# Altium PCB smallestSize.PcbDoc
Units mil, origin at the board's own origin, x right, y up, seen from the top; angles counter-clockwise.
Board outline 2105 x 2325 mil, 2 copper layers (Top Layer, Bottom Layer); 13 components, 2 nets, 40 pads, 0 vias.
Unrouted connection lines stored in the file: 19.
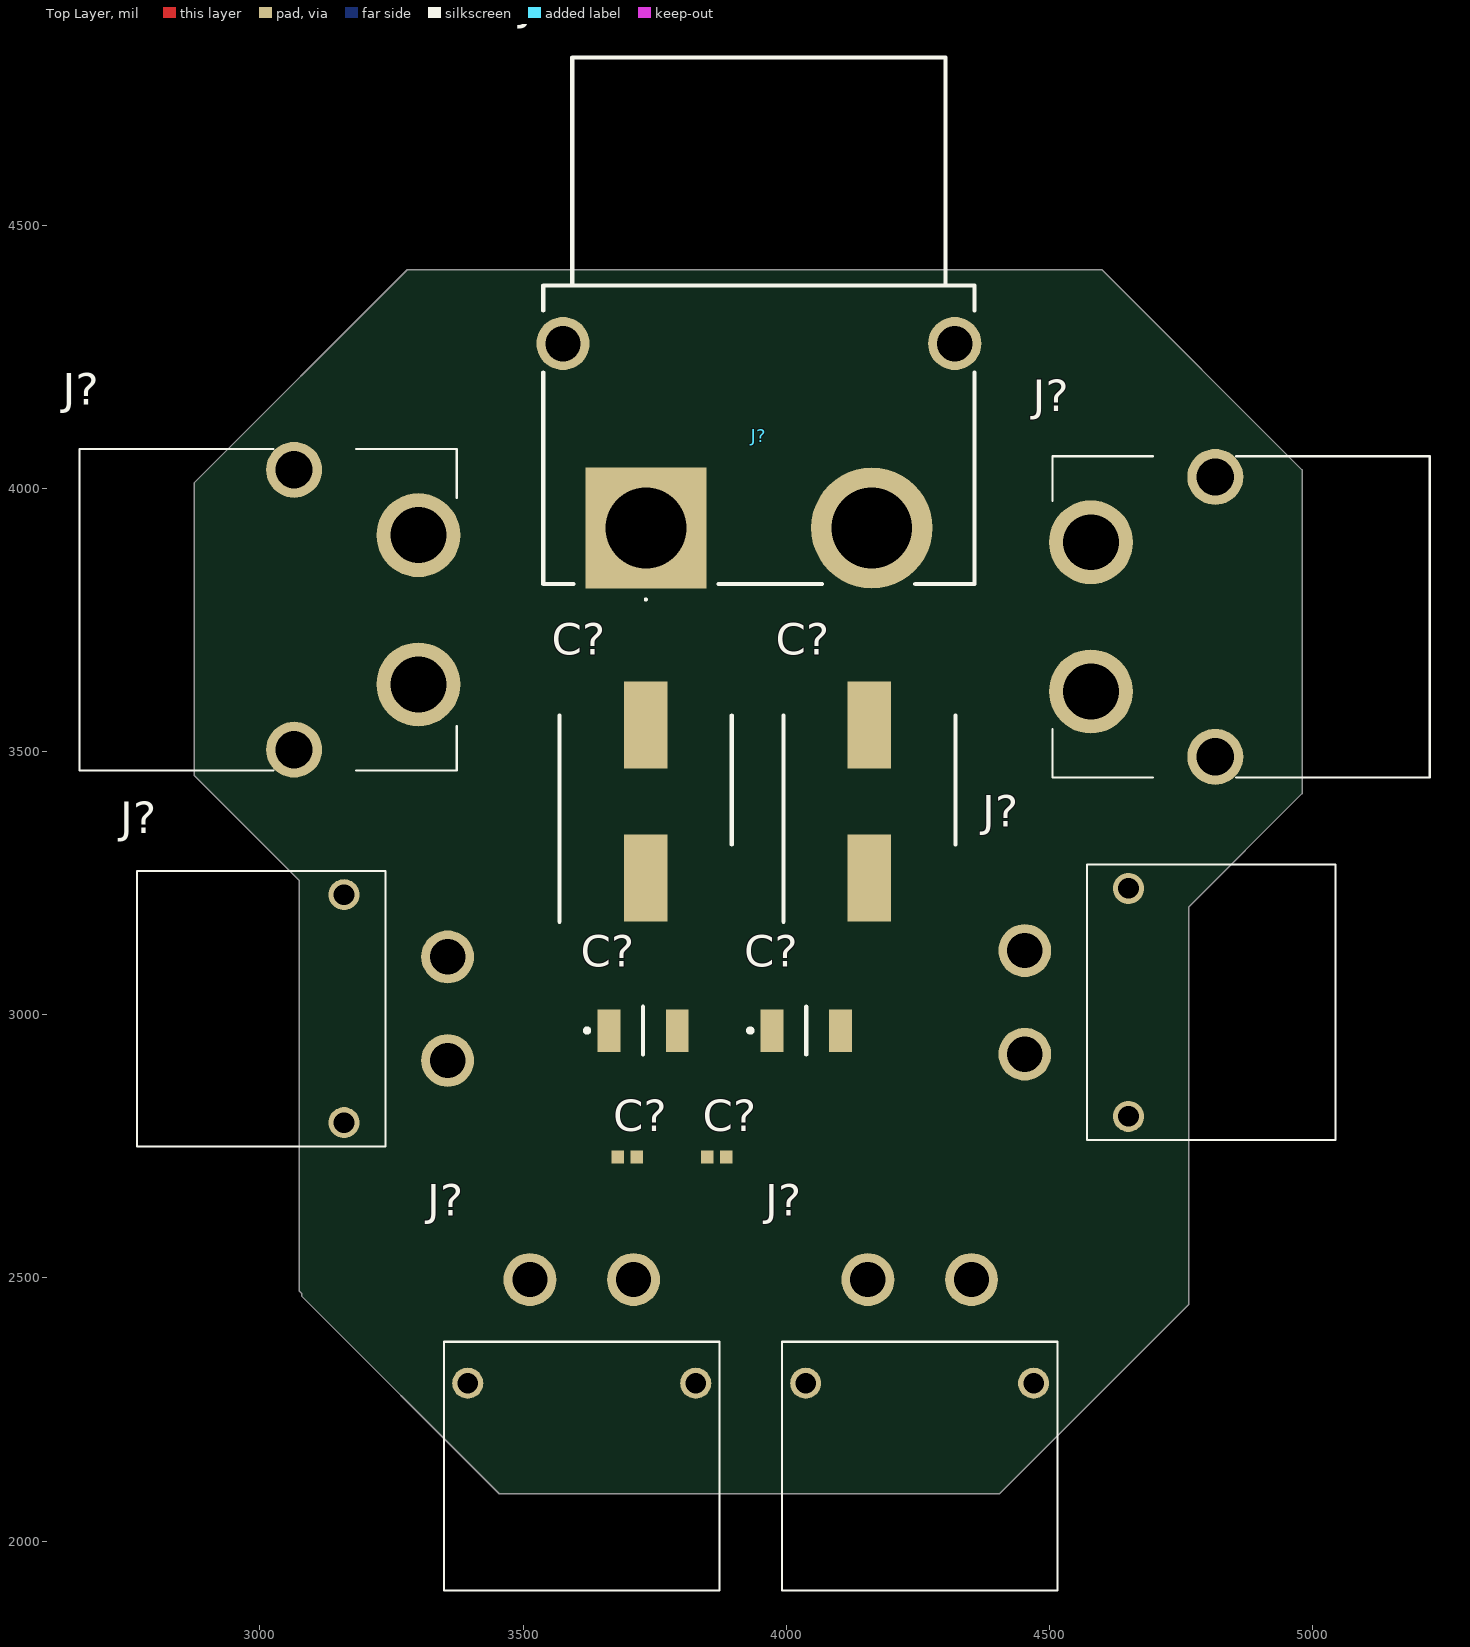
[diagram p0: Top Layer view]
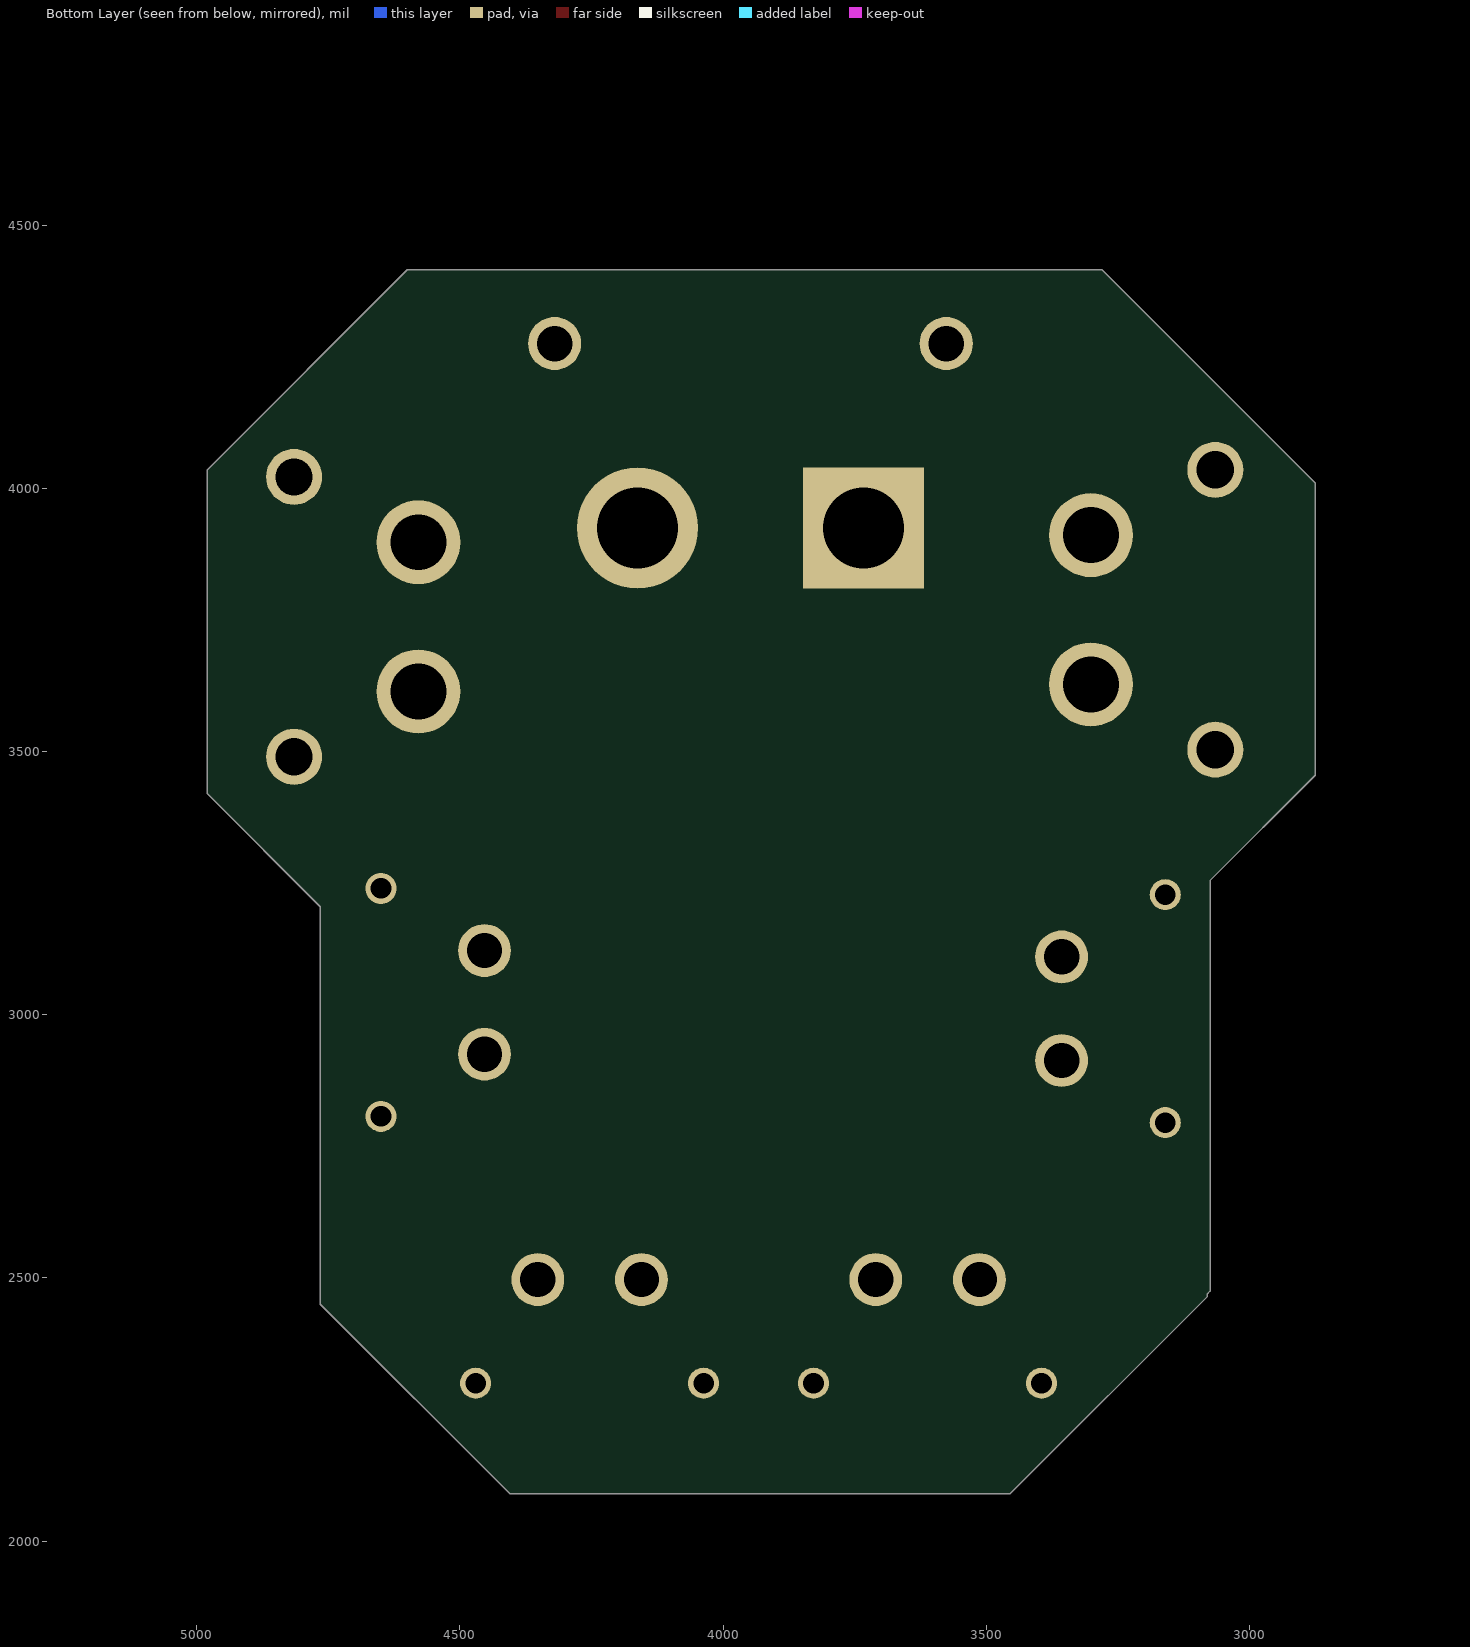
[diagram p1: Bottom Layer view, seen from below]

## Layer stack, top to bottom
Top Solder: solder mask 0.4, Solder Resist, Dk 3.5
Top Layer: signal copper 1.4
Dielectric 1: dielectric 12.6, FR-4, Dk 4.8
Bottom Layer: signal copper 1.4
Bottom Solder: solder mask 0.4, Solder Resist, Dk 3.5

## Board outline
3075,2475 3080,2470 3080,2465 3455,2090 4405,2090 4765,2450 4765,3205 4980,3420 4980,4035 4600,4415 3280,4415 2875,4010 2875,3455 3075,3255

## Design rules (kind name [scope] priority, off if disabled: settings)
Clearance [All] p1: gap=10 ignorepadtopadclearanceinfootprint=FALSE
PolygonConnect [All] p1: connectstyle=Relief reliefconductorwidth=10 reliefentries=4 polygonreliefangle="90 Angle" airgapwidth=10
RoutingVias [All] p1: holewidth=28 width=50 viastyle="Through Hole" minholewidth=28 minwidth=50 maxholewidth=28 maxwidth=50
SolderMaskExpansion [All] p1: expansion=4 istentingtop=FALSE
SupplyNets "Schematic Supply Nets" [InNet('GND')] p1: voltage=0.000
Width [All] p1: maxlimit=10 minlimit=10 preferedwidth=10
30 further rules are at their usual default settings.

## Classes and differential pairs
component class CP_schem: C? J?

## Components (designator, comment, footprint, x,y, rotation, side; value= is the part's Value field where it differs from the comment)
C? "10u" GRM32x 4038,2970 r0 top
C? "1u" CAPC1005X55N 3868,2730 r0 top
C? "1u" CAPC1005X55N 3698,2730 r0 top
C? "220u" CAPAE830X1050N 3733,3405 r90 top
C? "10u" GRM32x 3728,2970 r0 top
C? "220u" CAPAE830X1050N 4158,3405 r90 top
J? "XT30PW-F" XT30PWF 4351.89,2496.85 r180 top
J? "XT30PW-F" XT30PWF 3709.96,2496.85 r180 top
J? "XT30PW-F" XT30PWF 4453.15,3121.89 r270 top
J? "IN_BAT1" XT60PWM 3301.22,3769.25 r90 top
J? "XT90PW-F" XT90PWF 3733.39,3924.61 r180 top
J? "XT30PW-F" XT30PWF 3356.85,2913.11 r90 top
J? "IN_BAT2" XT60PWM 4578.78,3755.75 r270 top

## Footprints (in the part's own frame and the unit in brackets; to place one, negate y for a bottom-side part, rotate by r counter-clockwise, add the part's x,y. Pads: shape width x height; smd on the part's side, far side on the other; paste and mask are expansions set on the pad)
CAPAE830X1050N [mm]
  rect 4.2x2.1 smd: 1(-3.7,0) 2(3.7,0)
  silkscreen extent -5.8,-4.15 4.15,4.15, body extent -4.85,-4.15 4.85,4.15, height 10.2
CAPC1005X55N [mm]
  rect 0.6x0.62 smd: 1(-0.46,0) 2(0.46,0)
  body extent -0.5,-0.25 0.5,0.25, height 0.55
GRM32x [mm]
  rect 1.1x2.05 smd: 1(-1.65,0) 2(1.65,0)
  silkscreen extent -2.8,-1.15 0,1.15, body extent -1.6,-1.25 1.6,1.25, height 2.5
XT30PWF [mm]
  round 2.55 hole 1.7: 1(0,0) 2(5,0)
  round 1.5 hole 1: 3(-3,5) 4(8,5)
  silkscreen extent -4.15,3 9.15,15, body extent -4.15,-0.96 9.15,13.93, height 5.21
XT60PWM [mm]
  round 4.05 hole 2.7: 1(-3.6,0) 2(3.6,0)
  round 2.7 hole 1.8: 3(6.75,6) 4(-6.75,6)
  silkscreen extent -7.75,-1.85 7.75,16.35, body extent -7.95,-1.98 7.95,16.3, height 8.44
XT90PWF [mm]
  rect 5.85x5.85 hole 3.9: 1(0,0)
  round 5.85 hole 3.9: 2(-10.9,0)
  round 2.565 hole 1.71: 3(4,-8.9) 4(-14.9,-8.9)
  silkscreen extent -15.85,-22.7 4.95,3.5, body extent -16.2,-22.59 5.3,2.81, height 10.42

## Part data
C? C?: library part GRM32EC72A106ME05L, "Capacitor", Manufacturer_Name="Murata Electronics", Mouser Part Number=81-GRM32EC72A106ME5L, Arrow Part Number=GRM32EC72A106ME05L, Arrow Price/Stock=https://www.arrow.com/en/products/grm32ec72a106me05l/murata-manufacturing?region=nac, Datasheet Link=https://search.murata.co.jp/Ceramy/image/img/A01X/G101/ENG/GRM32EC72A106ME05-01A.pdf, Height=1.5mm, Manufacturer_Part_Number=GRM32EC72A106ME05L, Mouser Price/Stock=https://www.mouser.co.uk/ProductDetail/Murata-Electronics/GRM32EC72A106ME05L?qs=d0WKAl%252BL4KZOI4c17DDTDA%3D%3D
C? C?: library part JMK105BJ105KV-F, "Capacitor", Manufacturer_Name="TAIYO YUDEN", Mouser Part Number=963-JMK105BJ105KV-F, Arrow Part Number=JMK105BJ105KV-F, Arrow Price/Stock=https://www.arrow.com/en/products/jmk105bj105kv-f/taiyo-yuden?utm_currency=USD&region=nac, Datasheet Link=https://datasheet.datasheetarchive.com/originals/distributors/Datasheets-DGA20/25674.pdf, Height=0.55mm, Manufacturer_Part_Number=JMK105BJ105KV-F, Mouser Price/Stock=https://www.mouser.co.uk/ProductDetail/TAIYO-YUDEN/JMK105BJ105KV-F?qs=I6KAKw0tg2yJ6Hx%2Fbib9CA%3D%3D
C? C?: library part EEE-TG2A220UP, "Capacitor Polarised", Manufacturer_Name=Panasonic, Mouser Part Number=667-EEE-TG2A220UP, Arrow Part Number=EEE-TG2A220UP, Arrow Price/Stock=https://www.arrow.com/en/products/eee-tg2a220up/panasonic, Datasheet Link=http://industrial.panasonic.com/cdbs/www-data/pdf/RDE0000/ABA0000C1187.pdf, Height=10.5mm, Manufacturer_Part_Number=EEE-TG2A220UP, Mouser Price/Stock=https://www.mouser.co.uk/ProductDetail/Panasonic/EEE-TG2A220UP?qs=aAAGLDy8P2wq2CR02B4dOQ%3D%3D
J? J? J? J? J?: "Connector", Manufacturer_Name=Amass
  J? J? J? J?: Datasheet Link=https://www.tme.eu/Document/ce4077e36b79046da520ca73227e15de/XT30PW%20SPEC.pdf, Height=5mm, Manufacturer_Part_Number=XT30PW-F
  J?: Datasheet Link=https://www.tme.eu/Document/7357a049cc8e5ea73e34d2124a313a81/XT90PW.pdf, Height=10.3mm, Manufacturer_Part_Number=XT90PW-F
J? J?: library part XT60PW-M, "Connector", Manufacturer_Name="Changzou Amass Elec", Datasheet Link=https://www.tme.eu/Document/9b8d0c5eb7094295f3d3112c214d3ade/XT60PW%20SPEC.pdf, Height=8.4mm, Manufacturer_Part_Number=XT60PW-M

## Nets (pads, with @x,y where several pads share a name; then routed paths per layer and width w, separated by ;. In a path a pad name is that pad's centre, name@x,y a point inside that pad or via, vN(x,y) a via of type N, cw(c..) or ccw(c..) an arc to the next point about the centre after c; other vN are vias at no path point)
GND: C?.2 J?.2@3356.85,3109.96 J?.2@3513.11,2496.85 J?.2@4155.04,2496.85 J?.2@4162.52,3924.61 J?.2@4453.15,2925.04 J?.2@4578.78,3614.02
NetC?_1: C?.1@3663.04,2970 C?.1@3679.89,2730 C?.1@3733,3259.33 J?.1@3356.85,2913.11 J?.1@3709.96,2496.85 J?.1@4351.89,2496.85 J?.1@4453.15,3121.89 J?.1@4578.78,3897.48 J?.2@3301.22,3910.98
pads on no net: C?.1@3849.89,2730 C?.1@3973.04,2970 C?.1@4158,3259.33 J?.1@3301.22,3627.52 J?.1@3733.39,3924.61 J?.3 J?.4

## Silkscreen, mask and mechanical layers (free items; w line width, h text height)
Mechanical 1:
  the board outline again, w47.24